# Altium PCB PCB.PcbDoc
Units mm, origin at the board's own origin, x right, y up, seen from the top; angles counter-clockwise.
Board outline 22 x 16 mm, 2 copper layers (Top Layer, Bottom Layer), stack 1.671 mm thick; 15 components, 12 nets, 61 pads, 15 vias.
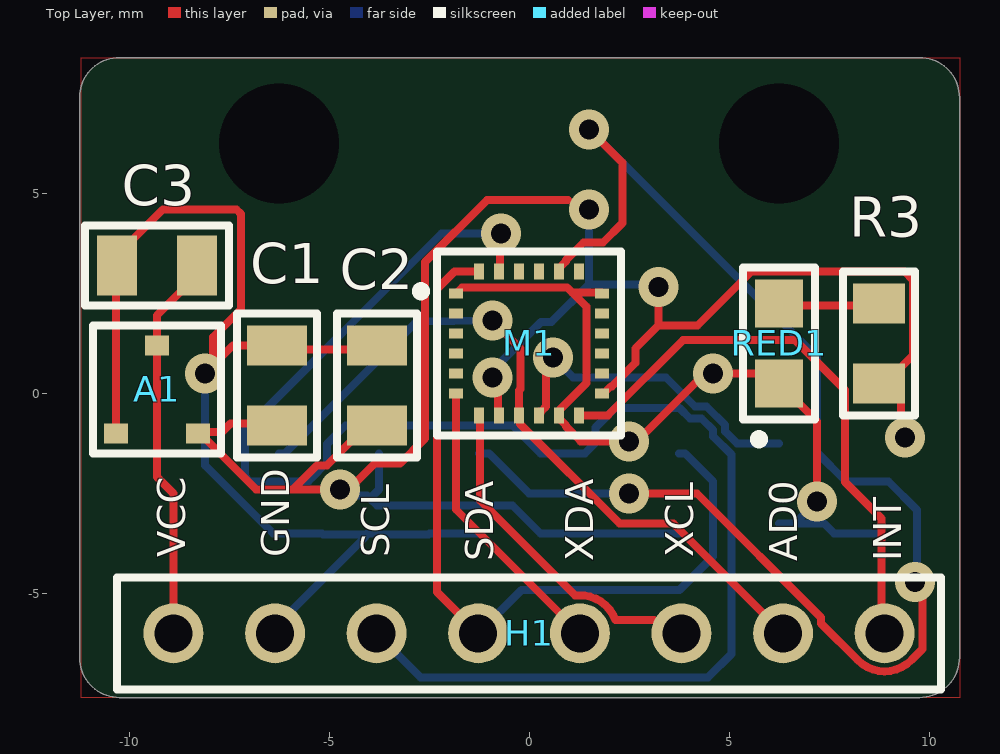
[diagram p0: Top Layer view]
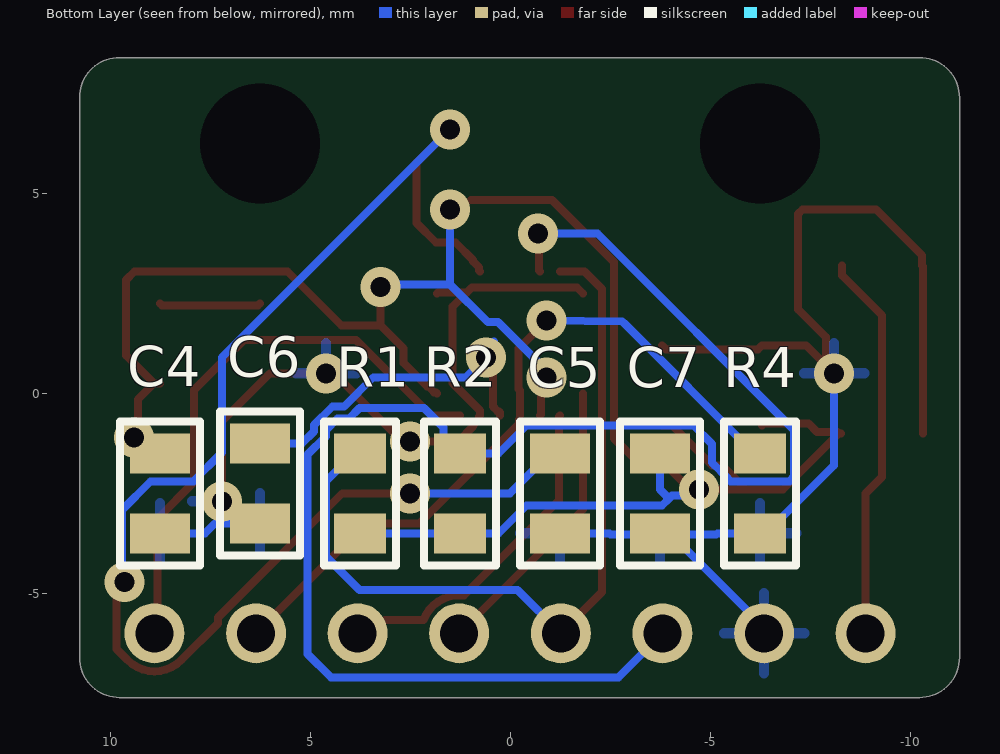
[diagram p1: Bottom Layer view, seen from below]
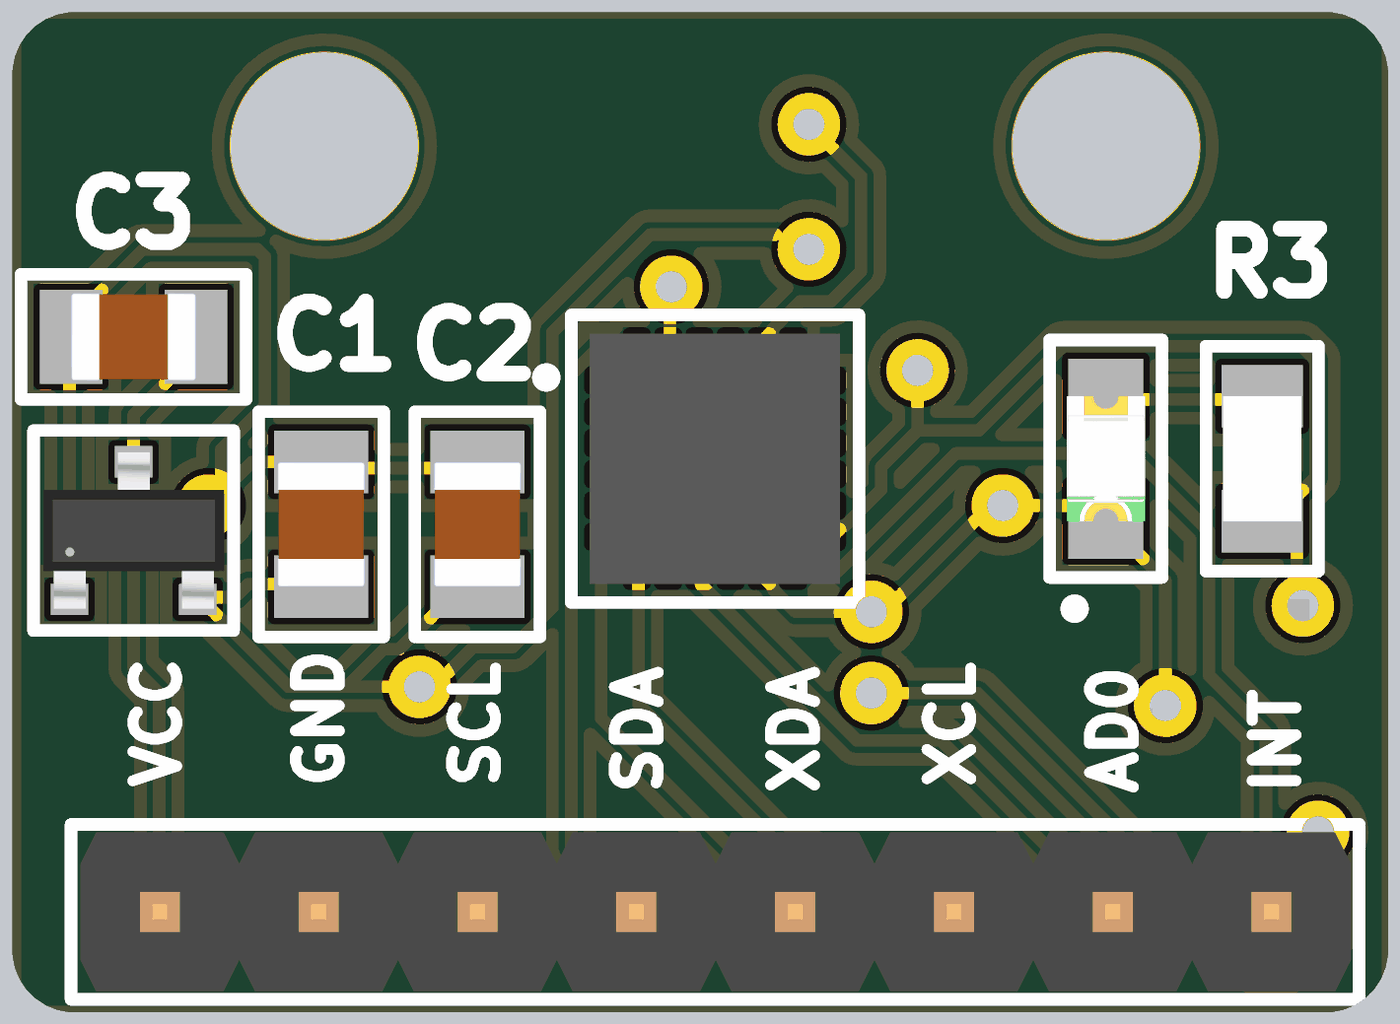
[diagram p2: 3D render of the assembled board from above, using the file's embedded part models]
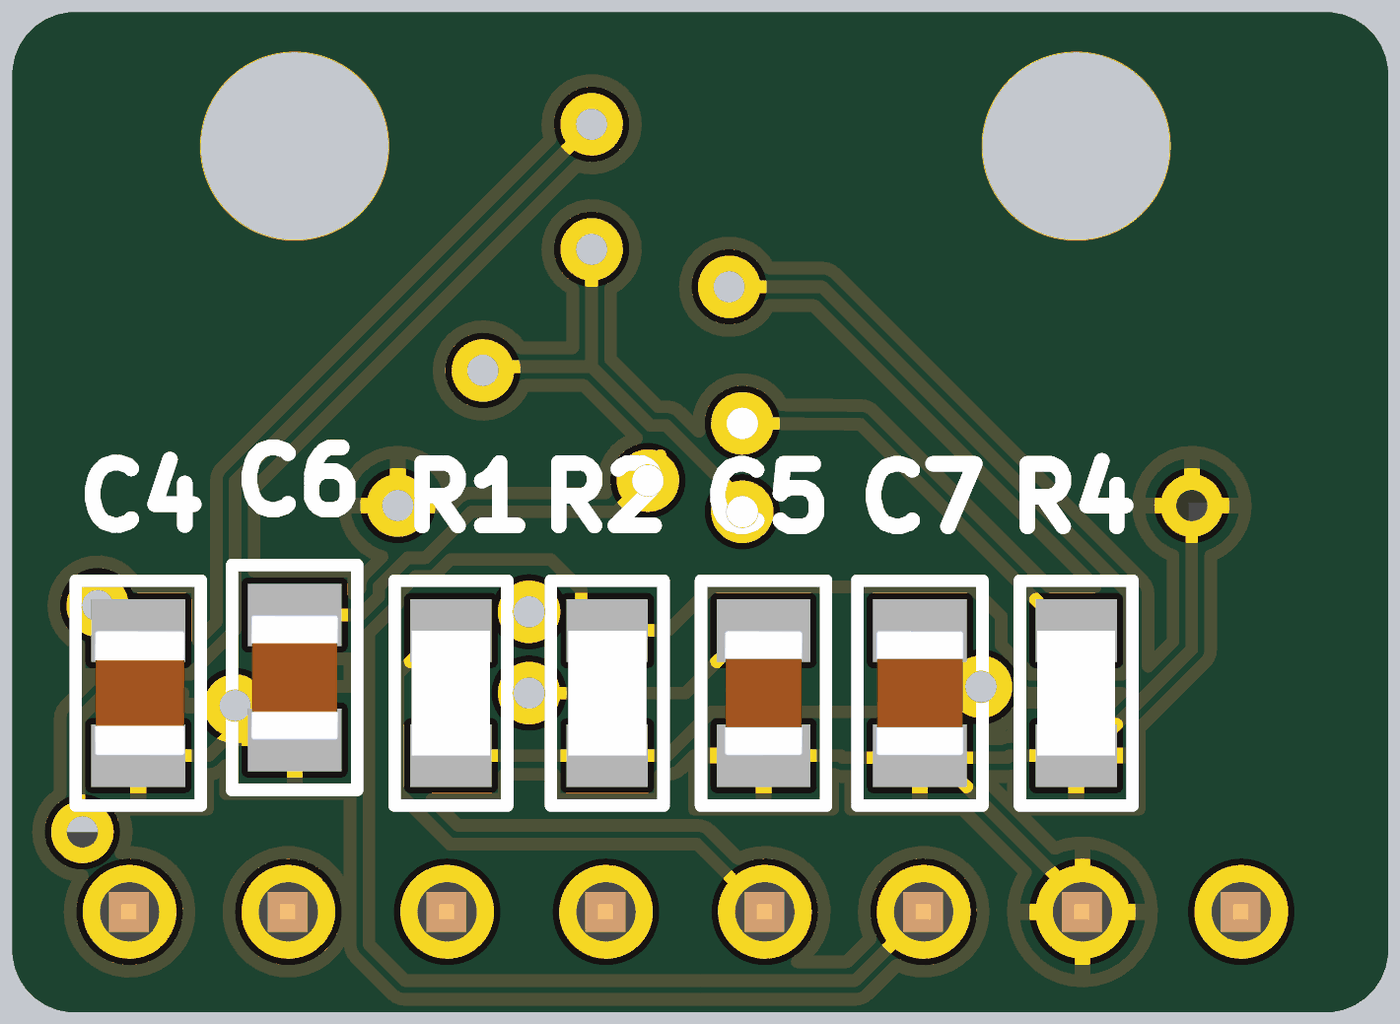
[diagram p3: 3D render of the assembled board from below, using the file's embedded part models]

## Layer stack, top to bottom
Top Solder: solder mask 0.0102, Solder Resist, Dk 3.5
Top Layer: signal copper 0.0356
Dielectric 1: dielectric 1.6, FR-4, Dk 4.8
Bottom Layer: signal copper 0.0356
Bottom Solder: solder mask 0.0102, Solder Resist, Dk 3.5

## Board outline
-10.237,-7.607 cw(c-10.237,-6.607) -11.237,-6.607 -11.237,7.393 cw(c-10.237,7.393) -10.237,8.393 9.763,8.393 cw(c9.763,7.393) 10.763,7.393 10.763,-6.607 cw(c9.763,-6.607) 9.763,-7.607

## Design rules (kind name [scope] priority, off if disabled: settings)
Clearance [All] p1: gap=0.1 ignorepadtopadclearanceinfootprint=FALSE
HoleSize [All] p1: absolutevalues=TRUE maxlimit=3 minlimit=0 maxpercent=80.000 minpercent=20.000
HoleToHoleClearance [All] p1: gap=0 allowstackedmicrovias=TRUE
MinimumSolderMaskSliver [All] p1: minsoldermaskwidth=0.01
PolygonConnect [All] p1: connectstyle=Relief reliefconductorwidth=0.254 reliefentries=4 polygonreliefangle="90 Angle" airgapwidth=0.254
RoutingVias [All] p1: holewidth=0.3 width=0.6 viastyle="Through Hole" minholewidth=0.3 minwidth=0.6 maxholewidth=0.3 maxwidth=0.6
SilkToSilkClearance [All] p1: silktosilkclearance=0.01
SilkToSolderMaskClearance [IsPad] p1: minsilkscreentomaskgap=0 clearancetoexposedcopper=TRUE
SolderMaskExpansion [All] p1: expansion=0.102 istentingtop=FALSE
Width [All] p1: maxlimit=0.4 minlimit=0.1 preferedwidth=0.3
25 further rules are at their usual default settings.

## Components (designator, comment, footprint, x,y, rotation, side; value= is the part's Value field where it differs from the comment)
A1 "AP2120N" AP2120N -9.3,0.2 r0 top
C1 "10uF" "10UF CAPACITOR" -6.3,0.2 r270 top
C2 "0.1uF" 0.1UF -3.8,0.2 r270 top
C3 "4.7uF" "4.7UF CAPACITOR" -9.3,3.2 r0 top
C4 "0.01uF" "0.01UF CAPACITOR" 8.75,-2.5 r270 bottom
C5 "2200pF" "2200PF CAPACITOR" -1.25,-2.5 r90 bottom
C6 "0.1uF" 0.1UF 6.25,-2.25 r90 bottom
C7 "0.1uF" 0.1UF -3.75,-2.5 r90 bottom
H1 "8x1 Header Pin" "8X1 HEADER PIN" 0,-6 r90 top
M1 "MPU-6050" MPU-6050 0,1.25 r0 top
R1 "4.7K Ohms" "4.7K RESISTOR" 3.75,-2.5 r270 bottom
R2 "4.7K Ohms" "4.7K RESISTOR" 1.25,-2.5 r270 bottom
R3 "1K" "1K RESISTOR" 8.75,1.25 r90 top
R4 "4.7K Ohms" "4.7K RESISTOR" -6.25,-2.5 r90 bottom
RED1 "RED LED" "RED LED" 6.25,1.25 r90 top

## Footprints (in the part's own frame and the unit in brackets; to place one, negate y for a bottom-side part, rotate by r counter-clockwise, add the part's x,y. Pads: shape width x height; smd on the part's side, far side on the other; paste and mask are expansions set on the pad)
0.1UF [mm]
  rect 1x1.5 smd: 1(-1,0) 2(1,0)
  silkscreen extent -1.8,-1 1.8,1, body extent -1,-0.7 1,0.7, height 1.25
"0.01UF CAPACITOR" [mm]
  rect 1x1.5 smd: 1(-1,0) 2(1,0)
  silkscreen extent -1.8,-1 1.8,1, body extent -1,-0.7 1,0.75, height 1.25
"1K RESISTOR" [mm]
  rect 1x1.3 smd: 1(-1,0) 2(1,0)
  silkscreen extent -1.8,-0.9 1.8,0.9, body extent -1,-0.62 1,0.62, height 0.61
"4.7K RESISTOR" [mm]
  rect 1x1.3 smd: 1(-1,0) 2(1,0)
  silkscreen extent -1.8,-0.9 1.8,0.9, body extent -1,-0.62 1,0.63, height 0.61
"4.7UF CAPACITOR" [mm]
  rect 1x1.5 smd: 1(-1,0) 2(1,0)
  silkscreen extent -1.8,-1 1.8,1, body extent -1,-0.7 1,0.7, height 1.25
"8X1 HEADER PIN" [mm]
  round 1.5 hole 0.95: 1(0,8.89) 2(0,6.35) 3(0,3.81) 4(0,1.27) 5(0,-1.27) 6(0,-3.81) 7(0,-6.35) 8(0,-8.89)
  silkscreen extent -1.4,-10.3 1.4,10.3, body extent -1.27,-10.17 1.27,10.15, height 5.55
"10UF CAPACITOR" [mm]
  rect 1x1.5 smd: 1(-1,0) 2(1,0)
  silkscreen extent -1.8,-1 1.8,1, body extent -1,-0.7 1,0.7, height 1.25
"2200PF CAPACITOR" [mm]
  rect 1x1.5 smd: 1(-1,0) 2(1,0)
  silkscreen extent -1.8,-1 1.8,1, body extent -1,-0.62 1,0.63, height 0.7
AP2120N [mm]
  rect 0.6x0.5 smd: 1(-1.025,-1.2) 2(1.025,-1.2) 3(0,1)
  silkscreen extent -1.6,-1.7 1.6,1.5, body extent -1.45,-1.35 1.45,1.15, height 1.1
MPU-6050 [mm]
  rect 0.35x0.25 smd: 1(-1.82,1.25) 2(-1.82,0.75) 3(-1.82,0.25) 4(-1.82,-0.25) 5(-1.82,-0.75) 6(-1.82,-1.25) 13(1.82,-1.25) 14(1.82,-0.75) 15(1.82,-0.25) 16(1.82,0.25) 17(1.82,0.75) 18(1.82,1.25)
  rect 0.25x0.4 smd: 7(-1.25,-1.8) 8(-0.75,-1.8) 9(-0.25,-1.8) 10(0.25,-1.8) 11(0.75,-1.8) 12(1.25,-1.8) 19(1.25,1.8) 20(0.75,1.8) 21(0.25,1.8) 22(-0.25,1.8) 23(-0.75,1.8) 24(-1.25,1.8)
  silkscreen extent -2.8,-2.3 2.3,2.3, body extent -2,-2 2,2, height 0.94
"RED LED" [mm]
  rect 1.2x1.2 smd: 1(-1,0) 2(1,0)
  silkscreen extent -2.5,-0.9 1.9,0.9, body extent -1,-0.62 1,0.63, height 0.7

## Part data
A1: library part AP2120N-3.3TRG1, "IC REG LINEAR 3.3V 150MA SOT23", Case/Package=SOT-23, Dropout Voltage=300mV, Manufacturer=Diodes, Max Input Voltage=6V, Max Operating Temperature=85°C, Max Output Current=150mA, Min Input Voltage=2V, Min Operating Temperature=-40°C, Operating Supply Current=25uA, Output Voltage=3.3V, Package Quantity=3000, Power Supply Rejection Ratio (PSRR)=65dB, Quiescent Current=50uA, Supplier Part Number 1=AP2120N-3.3TRG1DICT-ND, Accuracy=2%, Category="Voltage Regulators - Linear", ComponentLink1Description=https://datasheet.ciiva.com/29569/ap2120-29569977.pdf?src-supplier=Digi-Key, ComponentLink1URL=https://datasheet.ciiva.com/29569/ap2120-29569977.pdf?src-supplier=Digi-Key, ComponentLink2Description=https://datasheet.ciiva.com/30016/ap2120-30016809.pdf?src-supplier=Avnet, ComponentLink2URL=https://datasheet.ciiva.com/30016/ap2120-30016809.pdf?src-supplier=Avnet, ComponentLink3Description=https://datasheet.ciiva.com/29569/ap2120-29569978.pdf?src-supplier=Digi-Key, ComponentLink3URL=https://datasheet.ciiva.com/29569/ap2120-29569978.pdf?src-supplier=Digi-Key, ComponentLink4Description=https://datasheet.ciiva.com/29569/ap2120-29569979.pdf?src-supplier=Digi-Key, ComponentLink4URL=https://datasheet.ciiva.com/29569/ap2120-29569979.pdf?src-supplier=Digi-Key, Height=1.1mm, Lead Free="Lead Free", Length=3mm, Manufacturer Part Number=AP2120N-3.3TRG1, Mount="Surface Mount", Number of Outputs=1, Number of Pins=3, Number of Regulators=1, Output Current=150mA, Output Type=Fixed, Packaging="Tape and Reel", Polarity=Positive, Pricing 1="1=0.36000, 10=0.26700, 25=0.23400, 100=0.13370, 250=0.12536, 500=0.10030, 1000=0.07689 (USD)", Radiation Hardening=No, RoHS=Yes, Stock 1=110843, Supplier 1=Digi-Key, Weight=0.000282oz, Width=1.4mm
C1: library part GRM21BR71A106KA73K, "Cap Ceramic 10uF 10V X7R 10% Pad SMD 0805 125C T/R", Case/Package=0805, Dielectric=X7R, Manufacturer=Murata, Supplier Part Number 1=490-14381-1-ND, Tolerance=10%, Voltage Rating (DC)=10V, Capacitance=10uF, Category="Ceramic Capacitors", ComponentLink1Description=http://search.murata.co.jp/Ceramy/image/img/A01X/G101/ENG/GRM21BR71A106KA73-01.pdf?src-supplier=Digi-Key, ComponentLink1URL=http://search.murata.co.jp/Ceramy/image/img/A01X/G101/ENG/GRM21BR71A106KA73-01.pdf?src-supplier=Digi-Key, Length=2mm, Manufacturer Part Number=GRM21BR71A106KA73K, Pricing 1="1=0.19000, 10=0.12700, 50=0.07620, 100=0.06440, 500=0.04404, 1000=0.03896, 2500=0.03727, 5000=0.03388 (USD)", RoHS=No, Stock 1=325088, Supplier 1=Digi-Key, Thickness=1.25mm, Width=1.25mm
C2 C6 C7: library part GCM21BR72A104KA37L, "CAP CER 0.1UF 100V X7R 0805", Capacitance=100nF, Case Code (Imperial)=0805, Case Code (Metric)=2012, Dielectric=X7R, Manufacturer=Murata, Max Operating Temperature=125°C, Min Operating Temperature=-55°C, Package Quantity=1, Ratings=AEC-Q200, Supplier Part Number 1=490-4789-1-ND, Tolerance=10%, Voltage=100V, Case/Package=0805, Category="Ceramic Capacitors", ComponentLink1Description=https://datasheet.ciiva.com/2989/product-2989248.pdf?src-supplier=Avnet, ComponentLink1URL=https://datasheet.ciiva.com/2989/product-2989248.pdf?src-supplier=Avnet, ComponentLink2Description=https://datasheet.ciiva.com/18183/getdatasheetpartid-248062-18183712.pdf?src-supplier=Verical, ComponentLink2URL=https://datasheet.ciiva.com/18183/getdatasheetpartid-248062-18183712.pdf?src-supplier=Verical, ComponentLink3Description=https://datasheet.ciiva.com/11786/0900766b80ef92d0-11786205.pdf?src-supplier=RSComponents, ComponentLink3URL=https://datasheet.ciiva.com/11786/0900766b80ef92d0-11786205.pdf?src-supplier=RSComponents, ComponentLink4Description=https://datasheet.ciiva.com/135/product-135646.pdf?src-supplier=Digi-Key, ComponentLink4URL=https://datasheet.ciiva.com/135/product-135646.pdf?src-supplier=Digi-Key, ComponentLink5Description=https://datasheet.ciiva.com/135/product-135647.pdf?src-supplier=Digi-Key, ComponentLink5URL=https://datasheet.ciiva.com/135/product-135647.pdf?src-supplier=Digi-Key, ComponentLink6Description=https://datasheet.ciiva.com/135/product-135648.pdf?src-supplier=Digi-Key, ComponentLink6URL=https://datasheet.ciiva.com/135/product-135648.pdf?src-supplier=Digi-Key, ComponentLink7Description=https://datasheet.ciiva.com/48671/product-48671358.pdf?src-supplier=Avnet, ComponentLink7URL=https://datasheet.ciiva.com/48671/product-48671358.pdf?src-supplier=Avnet, ComponentLink8Description=https://datasheet.ciiva.com/16449/product-16449295.pdf?src-supplier=Future+Electronics, ComponentLink8URL=https://datasheet.ciiva.com/16449/product-16449295.pdf?src-supplier=Future+Electronics, Depth=1.25mm, Height=1.25mm, Lead Free="Lead Free", Length=2mm, Manufacturer Part Number=GCM21BR72A104KA37L, Mount="Surface Mount", Packaging="Tape and Reel", Pricing 1="1=0.28000, 10=0.19000, 50=0.12680, 100=0.10770, 500=0.07606, 1000=0.06655 (USD)", Radiation Hardening=No, REACH SVHC="No SVHC", RoHS=Yes, Stock 1=11174853, Supplier 1=Digi-Key, Termination=SMD/SMT, Thickness=0.055inch, Voltage Rating=100V, Voltage Rating (DC)=100V, Width=0.049inch
C3: library part GRM21BR71C475KE51L, "Capacitor: ceramic; 4.7uF; 16V; X7R; ±10%; SMD; 0805; Series: GRM", Case/Package=0805, Dielectric=X7R, Manufacturer=Murata, Supplier Part Number 1=490-14466-1-ND, Tolerance=10%, Voltage Rating (DC)=16V, Capacitance=4.7uF, Category="Ceramic Capacitors", ComponentLink1Description=http://www.farnell.com/datasheets/2189142.pdf?src-supplier=Farnell, ComponentLink1URL=http://www.farnell.com/datasheets/2189142.pdf?src-supplier=Farnell, ComponentLink2Description=http://search.murata.co.jp/Ceramy/image/img/A01X/G101/ENG/GRM21BR71C475KE51-01.pdf?src-supplier=Digi-Key, ComponentLink2URL=http://search.murata.co.jp/Ceramy/image/img/A01X/G101/ENG/GRM21BR71C475KE51-01.pdf?src-supplier=Digi-Key, Length=2mm, Manufacturer Part Number=GRM21BR71C475KE51L, Pricing 1="1=0.19000, 10=0.13500, 50=0.07680, 100=0.06360, 500=0.04462, 1000=0.03694 (USD)", RoHS=No, Stock 1=188751, Supplier 1=Digi-Key, Thickness=1.25mm, Width=1.25mm
C4: library part GCJ21BR72E103KXJ3L, "MURATA   GCJ21BR72E103KXJ3L   CAP, MLCC, X7R, 10NF, 250V, 0805", Capacitance=10nF, Case Code (Imperial)=0805, Case Code (Metric)=2012, Dielectric=X7R, Manufacturer=Murata, Max Operating Temperature=125°C, Min Operating Temperature=-55°C, Package Quantity=3000, Ratings=AEC-Q200, Supplier Part Number 1=490-5595-1-ND, Tolerance=10%, Voltage Rating=250V, Case/Package=0805, Category="Ceramic Capacitors", ComponentLink1Description=https://datasheet.ciiva.com/136/s0717e-136341.pdf?src-supplier=Digi-Key, ComponentLink1URL=https://datasheet.ciiva.com/136/s0717e-136341.pdf?src-supplier=Digi-Key, ComponentLink2Description=https://datasheet.ciiva.com/136/s0717e-136342.pdf?src-supplier=Digi-Key, ComponentLink2URL=https://datasheet.ciiva.com/136/s0717e-136342.pdf?src-supplier=Digi-Key, ComponentLink3Description=https://datasheet.ciiva.com/136/s0717e-136343.pdf?src-supplier=Digi-Key, ComponentLink3URL=https://datasheet.ciiva.com/136/s0717e-136343.pdf?src-supplier=Digi-Key, ComponentLink4Description=https://datasheet.ciiva.com/22698/1666661-22698366.pdf?src-supplier=Element14, ComponentLink4URL=https://datasheet.ciiva.com/22698/1666661-22698366.pdf?src-supplier=Element14, Features="Soft Termination", Length=0.079inch, Manufacturer Part Number=GCJ21BR72E103KXJ3L, Mount="Surface Mount", Packaging="Tape and Reel", Pricing 1="1=0.29000, 10=0.20200, 50=0.13440, 100=0.11420, 500=0.08064, 1000=0.07056 (USD)", REACH SVHC="No SVHC", RoHS=Yes, Stock 1=32179, Supplier 1=Digi-Key, Termination=SMD/SMT, Thickness=0.057inch, Voltage Rating (DC)=250V, Width=0.049inch
C5: library part GRM2165C2A222JA01D, "Multilayer Ceramic Capacitors MLCC - SMD/SMT 0805 2200pF 100volt C0G +/-5%", Capacitance=2.2nF, Case Code (Imperial)=0805, Case Code (Metric)=2012, Dielectric=C0G, Manufacturer=Murata, Max Operating Temperature=125°C, Min Operating Temperature=-55°C, Package Quantity=4000, Supplier Part Number 1=490-6448-1-ND, Tolerance=5%, Voltage Rating=100V, Case/Package=0805, Category="Ceramic Capacitors", ComponentLink1Description=https://datasheet.ciiva.com/5417/product-5417110.pdf?src-supplier=Mouser, ComponentLink1URL=https://datasheet.ciiva.com/5417/product-5417110.pdf?src-supplier=Mouser, ComponentLink2Description=https://datasheet.ciiva.com/6270/partnumbering-e-01-6270474.pdf?src-supplier=Digi-Key, ComponentLink2URL=https://datasheet.ciiva.com/6270/partnumbering-e-01-6270474.pdf?src-supplier=Digi-Key, ComponentLink3Description=https://datasheet.ciiva.com/6270/partnumbering-e-01-6270475.pdf?src-supplier=Digi-Key, ComponentLink3URL=https://datasheet.ciiva.com/6270/partnumbering-e-01-6270475.pdf?src-supplier=Digi-Key, ComponentLink4Description=https://datasheet.ciiva.com/6270/partnumbering-e-01-6270476.pdf?src-supplier=Digi-Key, ComponentLink4URL=https://datasheet.ciiva.com/6270/partnumbering-e-01-6270476.pdf?src-supplier=Digi-Key, Depth=1.25mm, Height=0.6mm, Length=2mm, Manufacturer Part Number=GRM2165C2A222JA01D, Mount="Surface Mount", Packaging="Tape and Reel", Pricing 1="1=0.22000, 10=0.14900, 50=0.08960, 100=0.07570, 500=0.05176, 1000=0.04579 (USD)", Radiation Hardening=No, RoHS=Yes, Stock 1=68525, Supplier 1=Digi-Key, Termination=SMD/SMT, Thickness=0.028inch, Voltage Rating (DC)=100V, Width=0.049inch
H1: library part 61300811121, "Board-To-Board Connector, Vertical, Wr-Phd Series, Through Hole, Header, 8, 2.54 Mm", Color=Black, Manufacturer="Wurth Electronics", Supplier Part Number 1=732-5321-ND, Category=Connectors, ComponentLink1Description=http://www.farnell.com/cad/1737268.pdf?src-supplier=Element14, ComponentLink1URL=http://www.farnell.com/cad/1737268.pdf?src-supplier=Element14, ComponentLink2Description=https://katalog.we-online.de/em/datasheet/6130xx11121.pdf?src-supplier=Digi-Key, ComponentLink2URL=https://katalog.we-online.de/em/datasheet/6130xx11121.pdf?src-supplier=Digi-Key, Connector Type="Male Pin", Contact Material=Copper, Contact Mating Length=0.236inch, Contact Plating=Gold, Gender=Male, Manufacturer Part Number=61300811121, Mount="Through Hole", Number of Contacts=8, Number of Positions=8, Number of Rows=1, Packaging=Bulk, Pitch=0.1inch, Pricing 1="1=0.37000, 10=0.31500, 25=0.26320, 50=0.21900, 100=0.19900, 1000=0.18100 (USD)", REACH SVHC=Unknown, RoHS=Yes, Stock 1=16067, Supplier 1=Digi-Key, Termination=Solder
M1: "INVENSENSE   MPU-6050   GYRO / ACCEL, 6-AXIS, I2C, QFN-24", Case/Package=QFN, Manufacturer="TDK InvenSense", Max Operating Temperature=85°C, Min Operating Temperature=-40°C, Supplier Part Number 1=1428-1007-1-ND, Category="Inertial Measurement Units (IMUs)", ComponentLink1Description=https://datasheet.ciiva.com/1513/1788002-1513632.pdf?src-supplier=Element14, ComponentLink1URL=https://datasheet.ciiva.com/1513/1788002-1513632.pdf?src-supplier=Element14, ComponentLink2Description=https://datasheet.ciiva.com/22731/1788002-22731434.pdf?src-supplier=Element14, ComponentLink2URL=https://datasheet.ciiva.com/22731/1788002-22731434.pdf?src-supplier=Element14, Manufacturer Part Number=MPU-6050, Mount="Surface Mount", Output Type=I2C, Packaging="Tape and Reel", Pricing 1="1=7.55000, 5=6.62600, 10=5.96300, 25=5.30000, 50=4.90260, 100=4.24000, 500=3.97500, 1000=3.71000 (USD)", RoHS=Yes, Sensor Type="Accelerometer,Gyroscope,3 Axis", Stock 1=7274, Supplier 1=Digi-Key
R1 R2 R4: library part RNCP0805FTD4R70, "RES SMD 4.7 OHM 1% 1/4W 0805", Case Code (Imperial)=0805, Case Code (Metric)=2012, Manufacturer="Stackpole Electronics", Max Operating Temperature=155°C, Max Power Dissipation=250mW, Min Operating Temperature=-55°C, Resistance=4.7R, Resistor Type="Thin Film", Supplier Part Number 1=RNCP0805FTD4R70CT-ND, Temperature Coefficient=100ppm/°C, Tolerance=1%, Case/Package=0805, Category="Chip SMD Resistors", ComponentLink1Description=http://www.seielect.com/Catalog/SEI-rncp.pdf?src-supplier=Digi-Key, ComponentLink1URL=http://www.seielect.com/Catalog/SEI-rncp.pdf?src-supplier=Digi-Key, ComponentLink2Description=https://www.seielect.com/catalog/SEI-Packaging.pdf?src-supplier=Digi-Key, ComponentLink2URL=https://www.seielect.com/catalog/SEI-Packaging.pdf?src-supplier=Digi-Key, Features="Moisture Resistant,Anti-Sulfur", Height=0.024inch, Length=0.079inch, Manufacturer Part Number=RNCP0805FTD4R70, Mount="Surface Mount", Number of Terminations=2, Packaging="Tape and Reel", Pricing 1="1=0.10000, 10=0.07000, 100=0.02830, 1000=0.01272, 2500=0.01104 (USD)", RoHS=Yes, Stock 1=22011, Supplier 1=Digi-Key, Width=0.049inch
R3: library part RNCP0805FTD1K00, "RES 1K OHM 1% 1/4W 0805", Case Code (Imperial)=0805, Case Code (Metric)=2012, Manufacturer="Stackpole Electronics", Max Operating Temperature=155°C, Max Power Dissipation=250mW, Min Operating Temperature=-55°C, Resistance=1kR, Resistor Type="Thin Film", Supplier Part Number 1=RNCP0805FTD1K00CT-ND, Temperature Coefficient=100ppm/°C, Tolerance=1%, Case/Package=0805, Category="Chip SMD Resistors", ComponentLink1Description=http://www.seielect.com/Catalog/SEI-rncp.pdf?src-supplier=Future+Electronics, ComponentLink1URL=http://www.seielect.com/Catalog/SEI-rncp.pdf?src-supplier=Future+Electronics, ComponentLink2Description=https://www.seielect.com/catalog/SEI-Packaging.pdf?src-supplier=Digi-Key, ComponentLink2URL=https://www.seielect.com/catalog/SEI-Packaging.pdf?src-supplier=Digi-Key, ComponentLink3Description=https://www.seielect.com/Catalog/SEI-rncp.pdf?src-supplier=Digi-Key, ComponentLink3URL=https://www.seielect.com/Catalog/SEI-rncp.pdf?src-supplier=Digi-Key, Features="Moisture Resistant,Anti-Sulfur", Height=0.024inch, Lead Free="Lead Free", Length=0.079inch, Manufacturer Part Number=RNCP0805FTD1K00, Mount="Surface Mount", Number of Terminations=2, Packaging="Tape and Reel", Power Rating=250mW, Pricing 1="1=0.10000, 10=0.07000, 100=0.02830, 1000=0.01272, 2500=0.01104 (USD)", RoHS=Yes, Stock 1=271680, Supplier 1=Digi-Key, Width=0.049inch
RED1: library part 150080RS75000, "SMD LED red 2.4 V 0805, 150080RS75000, Würth Elektronik", Case Code (Imperial)=0805, Case Code (Metric)=2012, Color=Red, Forward Current=30mA, Forward Voltage=2V, Manufacturer="Wurth Electronics", Max Operating Temperature=85°C, Min Operating Temperature=-40°C, Package Quantity=4000, Supplier Part Number 1=732-4984-1-ND, Test Current=20mA, Case/Package=0805, Category=LEDs, ComponentLink1Description=https://datasheet.ciiva.com/22656/150080rs75000-22656961.pdf?src-supplier=Element14, ComponentLink1URL=https://datasheet.ciiva.com/22656/150080rs75000-22656961.pdf?src-supplier=Element14, ComponentLink2Description=https://datasheet.ciiva.com/29279/759435-da-01-en-chipled-0805-w-kl-rot-150080rs75000-29279032.pdf?src-supplier=Conrad, ComponentLink2URL=https://datasheet.ciiva.com/29279/759435-da-01-en-chipled-0805-w-kl-rot-150080rs75000-29279032.pdf?src-supplier=Conrad, Dominant Wavelength=625nm, Height=0.7mm, Length=2mm, Lens Style=Clear,Rectangular, Luminous Intensity=150mcd, Manufacturer Part Number=150080RS75000, Mount="Surface Mount", Packaging="Tape and Reel", Pricing 1="1=0.18000, 50=0.16500, 100=0.14200, 500=0.12300 (USD)", REACH SVHC=Unknown, RoHS=Yes, Stock 1=43201, Supplier 1=Digi-Key, Viewing Angle=140°, Wavelength=625nm, Width=1.25mm

## Free pads (board coordinates)
  round 1.524 hole 3: 16(-6.25,6.25) 16(6.25,6.25)

## Via types
v1: diameter 1, hole 0.5, Top Layer to Bottom Layer, 15 vias

## Nets (pads, with @x,y where several pads share a name; then routed paths per layer and width w, separated by ;. In a path a pad name is that pad's centre, name@x,y a point inside that pad or via, vN(x,y) a via of type N, cw(c..) or ccw(c..) an arc to the next point about the centre after c; other vN are vias at no path point)
+3V3: A1.2 C1.2 C2.2 C4.1 C7.2 M1.8 M1.13 R1.2 R2.2 R3.1 | length 53.4
  Top Layer w0.2: A1.2 A1.2@-8.225,-1 ; C1.2 -6.343,-0.757 -7.466,-0.757 -7.675,-0.966 -8.191,-0.966 A1.2@-8.225,-1 ; C2.2 -4.05,-0.8 -5.05,-1.8 -5.3,-1.8 -5.9,-2.4 ; v1(-0.91,0.4) -0.775,0.265 -0.775,-0.525 M1.8 ; 0.975,4.835 -1.046,4.835 -2.6,3.281 -2.6,-1.133 -3.229,-1.762 -3.862,-1.762 -4.5,-2.4 v1(-4.727,-2.4) -5.9,-2.4 ; M1.13 1.845,0.025 1.895,0.025 2.045,0.175 2.078,0.175 2.658,0.755 2.658,1.12 3.239,1.7 ; v1(3.239,2.661) 3.239,1.7 ; R3.1 R3.1@8.9,0.25 ; v1(9.4,-1.1) 9.3,-1 9.3,-0.15 R3.1@8.9,0.25 ; A1.2@-8.225,-1 -6.825,-2.4 -5.9,-2.4 ; 3.239,1.7 4.217,1.7 5.567,3.05 9.383,3.05 9.6,2.833 9.6,0.95 R3.1@8.9,0.25
  Bottom Layer w0.2: v1(-4.727,-2.4) -4.574,-2.553 -4.051,-2.553 -3.973,-2.63 ; C7.2 -3.75,-2.407 -3.973,-2.63 ; v1(-0.91,0.4) -0.91,0.571 0.298,1.779 0.556,1.779 1.5,2.723 ; v1(1.5,4.6) 1.5,2.723 ; v1(3.239,2.661) 3.177,2.723 1.5,2.723 ; R1.2 0.283,-3.5 -0.417,-2.8 -3.804,-2.8 -3.973,-2.63
+5V: A1.3 C3.2 H1.1 | length 9.8
  Top Layer w0.2: H1.1 -8.89,-2.504 -9.3,-2.094 -9.3,1.95 -8.3,2.95 C3.2
AD0: H1.7 M1.9 R4.2 | length 18.2
  Top Layer w0.2: v1(-0.91,1.815) -0.21,1.115 -0.21,0.11 -0.25,0.07 M1.9 ; M1.9@-0.225,-0.65 -0.225,-0.765 2.268,-3.258 3.608,-3.258 H1.7
  Bottom Layer w0.2: R4.2 -6.1,-1.5 -2.859,1.741 -2.8,1.8 v1(-0.91,1.815)
GND: A1.1 C1.1 C2.1 C3.1 C4.2 C5.1 C6.1 C7.1 H1.2 M1.1 M1.11 M1.18 R4.1 RED1.1 | length 50.8
  Top Layer w0.2: A1.1 -10.325,3.175 C3.1 -10.3,3.45 -9.15,4.6 -7.317,4.6 -7.2,4.483 -7.2,2.1 -7.895,1.405 -7.895,0.705 v1@-7.942,0.658 ; v1(-8.1,0.5) v1@-7.942,0.658 ; C2.1 -3.9,1.1 -6.2,1.1 C1.1 -7.4,1.2 v1@-7.942,0.658 ; M1.1 -1.67,2.65 0.95,2.65 1.075,2.525 ; M1.18 1.795,2.525 1.075,2.525 ; v1(7.2,-2.7) 7.2,-0.7 6,0.5 4.4,0.5 2.7,-1.2 1.292,-1.2 0.925,-0.833 0.925,-0.8 0.775,-0.65 0.775,-0.575 M1.11 0.75,-0.431 1.435,0.254 1.435,2.165 1.075,2.525
  Bottom Layer w0.2: v1(-8.1,0.5) -8.1,-1.8 -6.4,-3.5 -5.181,-3.5 -5.146,-3.535 -4.087,-3.535 -4.052,-3.5 C7.1 ; H1.2 -6.35,-5.85 C7.1@-4.087,-3.587 ; C7.1@-3.785,-3.535 -2.517,-3.535 -2.482,-3.5 C5.1 ; C6.1 C6.1@6.65,-3.25 ; v1(7.2,-2.7) C6.1@6.65,-3.25 ; C4.2 7.625,-3.5 7.375,-3.25 C6.1@6.65,-3.25
  other v1: 2.5,-1.2 4.6,0.5
INT: H1.8 M1.12 | length 14.4
  Top Layer w0.2: M1.12 1.969,-0.55 3.854,1.335 6.648,1.335 7.9,0.083 7.9,-2.219 8.809,-3.128 8.809,-5.919 H1.8
NetC5_2: C5.2 M1.20 | length 35.5
  Top Layer w0.2: M1.20 0.775,3.075 0.775,3.15 0.925,3.3 0.925,3.333 1.357,3.765 1.846,3.765 2.335,4.254 2.335,5.765 v1(1.5,6.6) ; v1(2.5,-2.5) 4.193,-2.5 7.3,-5.606 7.3,-5.671 7.3,-5.754 8.218,-6.672 ccw(c8.89,-6) 9.562,-6.672 9.84,-6.394 9.84,-4.909 9.723,-4.792 v1(9.644,-4.721)
  Bottom Layer w0.2: C5.2 -1,-1.5 0,-2.5 v1(2.5,-2.5) ; v1(1.5,6.6) 7.2,0.9 7.2,-1.483 7.917,-2.2 8.983,-2.2 9.7,-2.917 9.7,-4.665 v1(9.644,-4.721)
NetC6_2: C6.2 M1.10 | length 9.4
  Top Layer w0.2: M1.10 0.25,-0.475 0.275,-0.45 0.308,-0.45 0.425,-0.333 0.425,0.725 v1(0.6,0.9)
  Bottom Layer w0.2: v1@0.6,0.7 v1@0.7,0.8 ; v1(0.6,0.9) 0.6,1.1 0.4,1.3 0.7,1 v1@0.7,0.8 ; C6.2 5.2,-1.25 4.904,-0.954 4.904,-0.796 4.442,-0.335 4.154,-0.335 3.419,0.4 1.1,0.4 v1@0.7,0.8
NetR3_2: R3.2 RED1.2 | length 2.5
  Top Layer w0.2: RED1.2 6.3,2.2 8.7,2.2 R3.2
SCL: H1.3 M1.23 R2.1 | length 39.7
  Top Layer w0.2: M1.23 -0.725,3.075 -0.725,3.975 v1(-0.7,4)
  Bottom Layer w0.2: H1.3 -2.71,-7.1 4.478,-7.1 5.06,-6.518 5.06,-1.534 4.604,-1.078 4.604,-0.921 4.318,-0.635 4.03,-0.635 3.76,-0.365 2.154,-0.365 1.665,-0.854 1.665,-1.235 1.4,-1.5 0.283,-1.5 -0.417,-0.8 -4.583,-0.8 -5.05,-1.267 -5.05,-1.733 -5.117,-1.8 -5.4,-2.083 -5.517,-2.2 -6.983,-2.2 -7.1,-2.083 -7.1,-0.917 -2.183,4 v1(-0.7,4)
SDA: H1.4 M1.24 R1.1 | length 20
  Top Layer w0.2: H1.4 -2.3,-4.97 -2.3,2.603 -1.862,3.04 -1.275,3.04 -1.265,3.05 M1.24
  Bottom Layer w0.2: H1.4 -0.187,-4.917 3.766,-4.917 4.6,-4.083 4.6,-2.2 3.9,-1.5 R1.1
XCL: H1.6 M1.7 | length 8.6
  Top Layer w0.2: M1.7 -1.225,-0.575 -1.225,-2.675 1.151,-5.051 1.233,-5.051 ; 1.234,-5.051 1.237,-5.051 cw(c1.27,-6) 2.158,-5.663 3.121,-5.663 3.458,-6 H1.6
XDA: H1.5 M1.6 | length 7.3
  Top Layer w0.2: M1.6 -1.82,-2.91 H1.5
pads on no net: M1.2 M1.3 M1.4 M1.5 M1.14 M1.15 M1.16 M1.17 M1.19 M1.21 M1.22

## Polygon pours and split planes (outlines as drawn)
no net on Top Layer "NONET_L-01_P-001" (none, remove dead copper, pour order 0): -11.2,8.393 10.763,8.393 10.763,-7.607 -11.2,-7.607
GND on Top Layer "NONET_L-01_P-001" (none, remove dead copper, pour order 1): 4.3,13
GND on Bottom Layer "NONET_L-01_P-001" (none, remove dead copper, pour order 2): -11.25,8.393 10.9,8.393 10.9,-7.607 -11.25,-7.607

## Silkscreen, mask and mechanical layers (free items; w line width, h text height)
Top Overlay:
  text "VCC" at -8.6,-4.1 h0.7 r90
  text "GND" at -6,-4.1 h0.7 r90
  text "SCL" at -3.5,-4.1 h0.7 r90
  text "XCL" at 4.1,-4.1 h0.7 r90
  text "SDA" at -0.9,-4.2 h0.7 r90
  text "XDA" at 1.6,-4.2 h0.7 r90
  text "AD0" at 6.7,-4.2 h0.7 r90
  text "INT" at 9.3,-4.2 h0.7 r90
Board Outline:
  the board outline again, w0.013